# Altium PCB SmartTape.PcbDoc (part 1 of 2)
Units mm, origin at the board's own origin, x right, y up, seen from the top; angles counter-clockwise.
Board outline 81 x 35 mm, 2 copper layers (Top Layer, Bottom Layer), stack 1.57 mm thick; 71 components, 53 nets, 304 pads, 117 vias.
Unrouted connection lines stored in the file: 67.
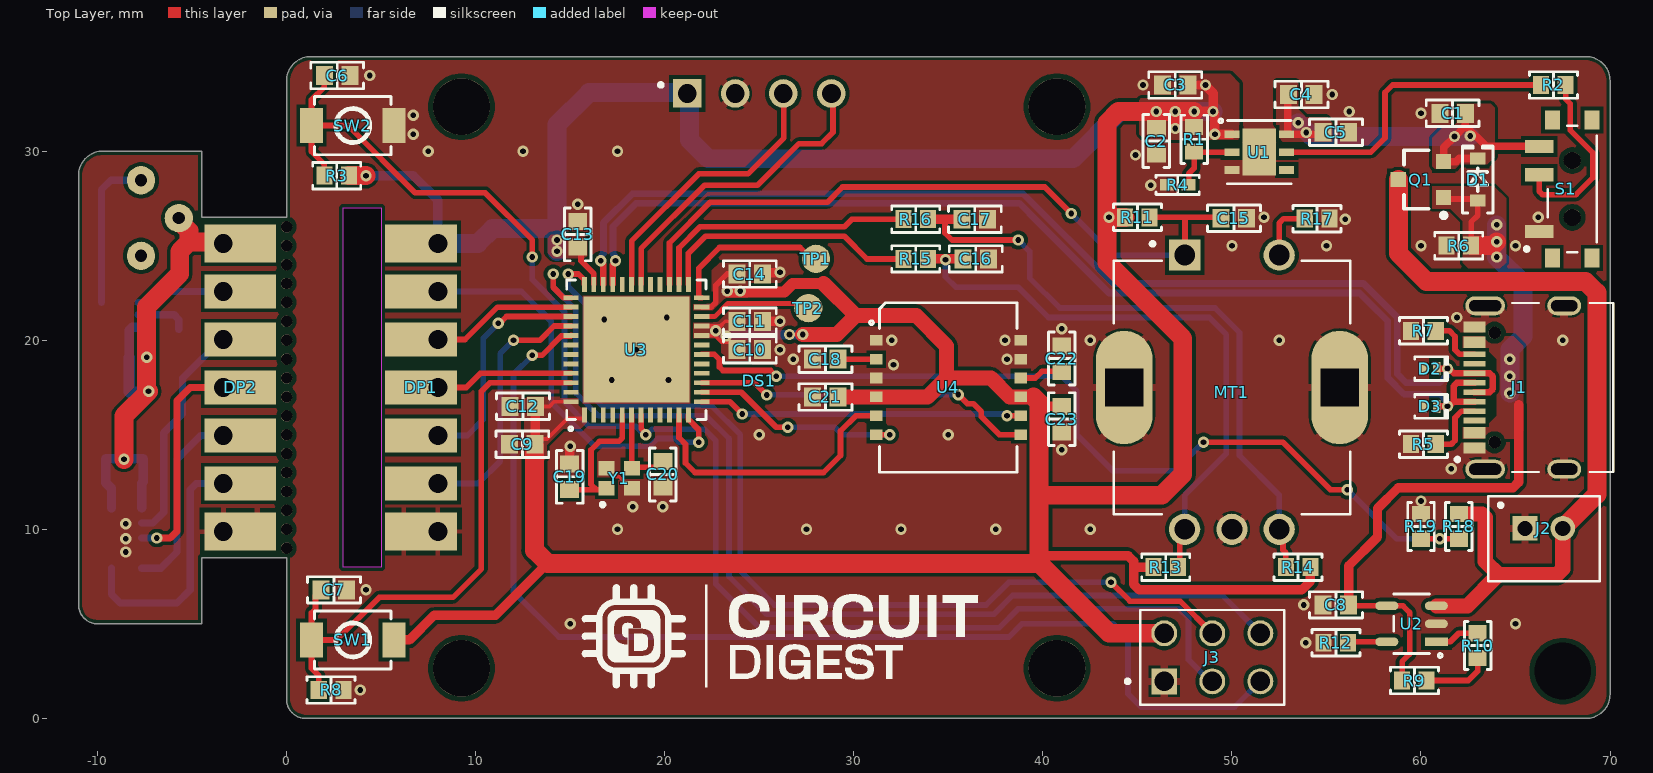
[diagram p0: Top Layer view]
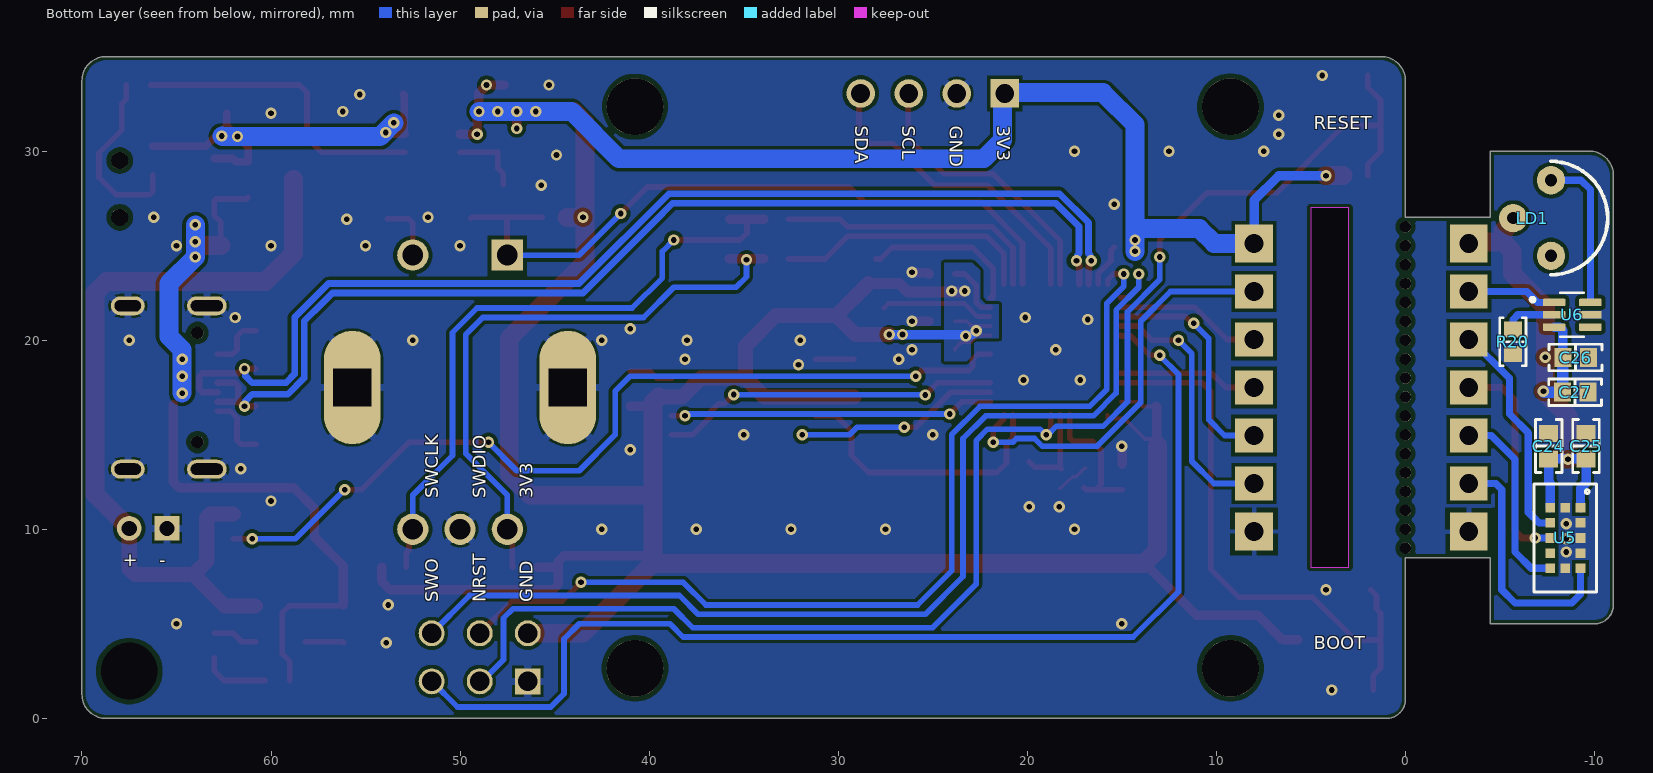
[diagram p1: Bottom Layer view, seen from below]

## Layer stack, top to bottom
Top Solder: solder mask 0.0127, Solder Resist, Dk 3.8
Top Layer: signal copper 0.035
Dielectric: core 1.5, FR-4, Dk 4.5
Bottom Layer: signal copper 0.035
Bottom Solder: solder mask 0.0127, Solder Resist, Dk 3.8

## Board outline
-10,5 cw(c-10,6) -11,6 -11,28.73 cw(c-9.73,28.73) -9.73,30 -4.5,30 -4.5,26.5 0,26.5 0,33.73 cw(c1.27,33.73) 1.27,35 68.73,35 cw(c68.73,33.73) 70,33.73 70,1.27 cw(c68.73,1.27) 68.73,0 1,0 cw(c1,1) 0,1 0,8.5 -4.5,8.5 -4.5,5
cut-out: 3,8 3,27 5,27 5,8

## Design rules (kind name [scope] priority, off if disabled: settings)
BoardOutlineClearance BoardOutlineClearance_1 [(InComponent('J1') OR InComponent('J2') OR InComponent('J3') OR InComponent('J4')OR InComponent('U2'))] p1: gap=0 ignorepadtopadclearanceinfootprint=FALSE
BoardOutlineClearance [All] p2: gap=0.2 ignorepadtopadclearanceinfootprint=FALSE
Clearance USB_PORT [InComponent('J1')] p1: gap=0.127 ignorepadtopadclearanceinfootprint=FALSE except(0.05: SMDPad-Hole; 0.15: Fill-Fill Fill-Poly Fill-Region Poly-Poly Poly-Region Region-Region; 0.18: Arc-Fill Arc-Poly Arc-Region Track-Fill Track-Poly Track-Region; 0.2: SMDPad-Fill SMDPad-Poly SMDPad-Region THPad-Fill THPad-Poly THPad-Region Via-Fill Via-Poly Via-Region; 0.25: Arc-Hole Track-Hole THPad-Hole Via-Hole Fill-Hole Poly-Hole Region-Hole Text-Hole)
Clearance [All] p2: gap=0.127 ignorepadtopadclearanceinfootprint=FALSE except(0.15: Fill-Fill Fill-Poly Fill-Region Poly-Poly Poly-Region Region-Region; 0.18: Arc-Fill Arc-Poly Arc-Region Track-Fill Track-Poly Track-Region; 0.2: SMDPad-Fill SMDPad-Poly SMDPad-Region THPad-Fill THPad-Poly THPad-Region Via-Fill Via-Poly Via-Region; 0.25: Arc-Hole Track-Hole SMDPad-Hole THPad-Hole Via-Hole Fill-Hole Poly-Hole Region-Hole Text-Hole)
DiffPairsRouting [InDifferentialPair('USB_D')] p1: maxlimit=0.15 minlimit=0.15 mostfreqgap=0.15 toplayer_minwidth=0.35 toplayer_maxwidth=0.581 toplayer_prefwidth=0.581 bottomlayer_minwidth=0.35 bottomlayer_maxwidth=0.581 bottomlayer_prefwidth=0.581 impedanceprofiledriven=TRUE impedanceprofileid={81415590-ECE1-4D54-A52A-9B79C84BBB9D} impedanceprofilevalue=90.000000 maxuncoupledlength=12.7
Height [All] p1: minheight=0 maxheight=1816.048 prefheight=12.7
HoleSize [All] p1: absolutevalues=TRUE maxlimit=6.3 minlimit=0.3 maxpercent=80.000 minpercent=20.000
HoleToHoleClearance [All] p1: gap=0.25 allowstackedmicrovias=FALSE
MinimumAnnularRing [All] p1: minimumring=0.076
MinimumSolderMaskSliver [All] p1: minsoldermaskwidth=0
PlaneClearance [All] p1: clearance=0.2
PlaneConnect PlaneConnectPowerPads [InPadClass('PowerPads')] p1: planeconnectstyle=Direct reliefexpansion=0.508 reliefentries=4 reliefconductorwidth=0.254 reliefairgap=0.254
PlaneConnect [All] p2: pad.planeconnectstyle=Relief pad.reliefexpansion=0.3 pad.reliefentries=4 pad.reliefconductorwidth=0.127 pad.reliefairgap=0.127 via.planeconnectstyle=Direct via.reliefexpansion=0.3 via.reliefentries=4 via.reliefconductorwidth=0.127 via.reliefairgap=0.127
PolygonConnect PolygonConnectPowerPads [All vs (InPadClass('PowerPads'))] p1: thpad.connectstyle=Relief thpad.reliefconductorwidth=0.4 thpad.reliefentries=4 thpad.polygonreliefangle="90 Angle" thpad.airgapwidth=0.254 thpad.conductorbypadedge=TRUE thpad.mindistance=0.381 thpad.enablemindistance=FALSE smdpad.connectstyle=Direct smdpad.reliefconductorwidth=0.254 smdpad.reliefentries=4 smdpad.polygonreliefangle="90 Angle" smdpad.airgapwidth=0.254 via.connectstyle=Direct via.reliefconductorwidth=0.254 via.reliefentries=4 via.polygonreliefangle="90 Angle" via.airgapwidth=0.254
PolygonConnect [All] p2: thpad.connectstyle=Relief thpad.reliefconductorwidth=0.4 thpad.reliefentries=4 thpad.polygonreliefangle="90 Angle" thpad.airgapwidth=0.127 thpad.conductorbypadedge=TRUE thpad.mindistance=0.381 thpad.enablemindistance=FALSE smdpad.connectstyle=Direct smdpad.reliefconductorwidth=0.127 smdpad.reliefentries=4 smdpad.polygonreliefangle="90 Angle" smdpad.airgapwidth=0.127 via.connectstyle=Direct via.reliefconductorwidth=0.127 via.reliefentries=4 via.polygonreliefangle="90 Angle" via.airgapwidth=0.127
RoutingVias [All] p1: holewidth=0.3 width=0.6 viastyle="Through Hole" minholewidth=0.3 minwidth=0.6 maxholewidth=0.6 maxwidth=6.6
SilkToSilkClearance [All] p1: silktosilkclearance=0
SilkToSolderMaskClearance [IsPad] p1: minsilkscreentomaskgap=0.1 clearancetoexposedcopper=TRUE
SolderMaskExpansion [All] p1: expansion=0.075 istentingtop=FALSE
SupplyNets "Schematic Supply Nets_4" [InNet('AGND')] p1: voltage=0.000
SupplyNets "Schematic Supply Nets_3" [InNet('AVDD')] p2: voltage=0.000
SupplyNets "Schematic Supply Nets_6" [InNet('VDD')] p3: voltage=0.000
SupplyNets "Schematic Supply Nets_5" [InNet('BAT')] p4: voltage=0.000
SupplyNets "Schematic Supply Nets_2" [InNet('3V3')] p5: voltage=0.000
SupplyNets "Schematic Supply Nets_1" [InNet('VBUS')] p6: voltage=0.000
SupplyNets "Schematic Supply Nets" [InNet('GND')] p7: voltage=0.000
Width [All] p1: maxlimit=25.4 minlimit=0.127 preferedwidth=0.127 minimp=50.000000 maximp=50.000000 favimp=50.000000
21 further rules are at their usual default settings.

## Classes and differential pairs
differential pair USB_D: +USB_D_P -USB_D_N

## Components (designator, comment, footprint, x,y, rotation, side; value= is the part's Value field where it differs from the comment)
C1 "10 µF" "CAP 0603_1608" 61.675,32 r0 top
C2 "0.1 µF" "CAP 0603_1608" 46,30.531 r90 top
C3 "10 µF" "CAP 0603_1608" 47,33.5 r0 top
C4 "0.1 µF" "CAP 0603_1608" 53.675,33 r180 top
C5 "10 µF" "CAP 0603_1608" 55.5,31 r180 top
C6 "0.1 µF" "CAP 0603_1608" 2.675,34 r180 top
C7 "0.1 µF" "CAP 0603_1608" 2.5,6.793 r180 top
C8 "1µF" "CAP 0603_1608" 55.5,6 r0 top
C9 "1µF" "CAP 0603_1608" 12.469,14.5 r0 top
C10 "0.1 µF" "CAP 0603_1608" 24.5,19.5 r180 top
C11 "1µF" "CAP 0603_1608" 24.5,21 r180 top
C12 "0.1 µF" "CAP 0603_1608" 12.5,16.5 r0 top
C13 "1µF" "CAP 0603_1608" 15.4,25.6 r270 top
C14 "10 µF" "CAP 0603_1608" 24.5,23.5 r180 top
C15 "0.1 µF" "CAP 0603_1608" 50.104,26.45 r180 top
C16 "0.1 µF" "CAP 0603_1608" 36.45,24.3 r180 top
C17 "0.1 µF" "CAP 0603_1608" 36.4,26.4 r180 top
C18 "0.1 µF" "CAP 0603_1608" 28.5,19 r0 top
C19 "8 pF" "CAP 0603_1608" 14.974,12.775 r270 top
C20 "8 pF" "CAP 0603_1608" 19.9,12.9 r90 top
C21 "0.1 µF" "CAP 0603_1608" 28.5,17 r0 top
C22 "0.1 µF" "CAP 0603_1608" 41,19.029 r270 top
C23 "0.1 µF" "CAP 0603_1608" 41,15.825 r90 top
C24 "0.1 µF" "CAP 0603_1608" -7.579,14.4 r270 bottom locked
C25 "10 µF" "CAP 0603_1608" -9.555,14.4 r270 bottom locked
C26 "1µF" "CAP 0603_1608" -9,19.084 r0 bottom locked
C27 "1µF" "CAP 0603_1608" -8.978,17.253 r0 bottom locked
D1 "CUS10S30,H3F" SOD323 63,28.5 r90 top
D2 "GG0402060R3C2P" 0402 60.474,18.5 r0 top
D3 "GG0402060R3C2P" 0402 60.474,16.5 r0 top
DP1 "DIM_PAD" DIM_PAD 6.2,25.12 r0 top locked
DP2 "DIM_PAD" DIM_PAD -1.55,9.88 r180 top locked
DS1 "OLED_128X64_1.3_I2C" LCD_OLED_128X64_1.3_I2C 25,17.5 r0 top
J1 "TYPE-C_16PIN_2MD_(073)" SHOUHAN_TYPE-C_16PIN_2MD_(073) 66.5,17.5 r90 top locked
J2 "B2B-PH-K-S(LF)(SN)" JST_B2B-PH-K-S(LF)(SN) 66.5,9.5 r180 top
J3 "TSHC-103-D-171-16-264-F-LF" MLE_TSHC-103-D-171-16-264-F-LF 48.96,3.23 r0 top
LD1 "RLD65NZN5" RLD65NZN5 -7.7,26.461 r180 bottom
MT1 "PEC11R-4215F-S0024" XDCR_PEC11R-4215F-S0024 50,17.5 r0 top locked
Q1 "AO3401A" AO-SOT-23-3L_V 60,28.5 r180 top
R1 "56 kOhms" "RES 0603_1608" 48,30.626 r90 top
R2 "1 kOhms" "RES 0603_1608" 67,33.5 r0 top
R3 "10 kOhms" "RES 0603_1608" 2.65,28.707 r0 top
R4 "10 kOhms" "RES 0402_1005" 47.133,28.219 r0 top
R5 "5.1 kOhms" "RES 0603_1608" 60.129,14.5 r0 top
R6 "100 kOhms" "RES 0603_1608" 62,25 r0 top
R7 "5.1 kOhms" "RES 0603_1608" 60.129,20.5 r0 top
R8 "10 kOhms" "RES 0603_1608" 2.35,1.5 r180 top
R9 "1 kOhms" "RES 0603_1608" 59.65,2 r180 top
R10 "0 Ohms" "RES 0603_1608" 63,3.85 r90 top
R11 "10 kOhms" "RES 0603_1608" 45,26.5 r180 top
R12 "1.65 kOhms" "RES 0603_1608" 55.5,4 r0 top
R13 "10 kOhms" "RES 0603_1608" 46.5,8 r180 top
R14 "10 kOhms" "RES 0603_1608" 53.5,8 r0 top
R15 "10 kOhms" "RES 0603_1608" 33.275,24.3 r180 top
R16 "10 kOhms" "RES 0603_1608" 33.275,26.4 r180 top
R17 "1 kOhms" "RES 0603_1608" 54.5,26.429 r180 top
R18 "100 kOhms" "RES 0603_1608" 62,10.15 r90 top
R19 "100 kOhms" "RES 0603_1608" 60,10.15 r270 top
R20 "3.74 kOhms" "RES 0603_1608" -5.686,19.917 r90 bottom locked
S1 "EG1215AA" SW_EG1215AA 68,28 r90 top
SW1 "TS-1088-AR02016" SW-SMD_L3.9-W3.0-P4.45 3.5,4.147 r180 top
SW2 "TS-1088-AR02016" SW-SMD_L3.9-W3.0-P4.45 3.5,31.353 r0 top
TP1 "ROUND PAD 1.5MM" "ROUND PAD 1.5MM"#1 27.6,24.2 r90 top
TP2 "ROUND PAD 1.5MM" "ROUND PAD 1.5MM"#2 27.6,21.7 r180 top
U1 "LD39200PU33R" SON_DFN6_3X3_STM 51.445,29.95 r0 top
U2 "LTC4057ES5-4.2" S_5_ADI 59.5,5 r180 top
U3 "STM32G491CEU6" QFPN_491CEU6_STM 18.5,19.5 r90 top locked
U4 "SCL3300-D01-10" SCL3300-D01-10_MUR 35,17.5 r0 top locked
U5 "VL53L4CXV0DH/1" LGA12_STM -8.461,9.54 r180 bottom locked
U6 "CAT4002A" CAT4002A -8.823,21.347 r180 bottom locked
Y1 "ECS-240-8-37B-CKY-TR" XTAL_ECS-160-9-37-CKM-TR 17.6,12.7 r0 top

## Footprints (in the part's own frame and the unit in brackets; to place one, negate y for a bottom-side part, rotate by r counter-clockwise, add the part's x,y. Pads: shape width x height; smd on the part's side, far side on the other; paste and mask are expansions set on the pad)
0402 [mm] "SODFL, 2-Leads, Body 0.675x1.075mm, IPC Medium Density"
  rect 0.4x0.7 smd: 1(-0.35,0) 2(0.35,0)
  silkscreen extent -0.8,-0.63 0.92,0.63, body extent -0.51,-0.31 0.5,0.3, height 0.45
AO-SOT-23-3L_V [mm] "SOT23, 3-Leads, Body 3.1x1.8mm, Pitch 0.95mm"
  rect 0.8x0.8 smd: 1(-1.2,0.95) 2(-1.2,-0.95) 3(1.2,0)
  silkscreen extent -1.33,-1.55 0.9,2.02, body extent -1.5,-1.55 1.5,1.55, height 1.25
"CAP 0603_1608" [mm] "Chip Capacitor, 2-Leads, Body 1.60x0.80mm, IPC Medium Density"
  rect 0.9x1 smd: 1(-0.675,0) 2(0.675,0)
  silkscreen extent -1.4,-0.7 1.4,0.7, body extent -0.8,-0.41 0.8,0.41, height 0.82
CAT4002A [mm]
  rrect25% 1.19x0.4 smd: 1(-0.96,0.65) 2(-0.96,0) 3(-0.96,-0.65) 4(0.96,-0.65) 5(0.96,0) 6(0.96,0.65)
  silkscreen extent -2.2,-1.17 0.63,1.17, body extent -1.05,-1 1.05,1, height 1.1
DIM_PAD [mm]
  rect 2x2 smd paste-2539.97: 1(0,0) 7(0,-15.24)
  rect 2x2 hole 1 paste-2539.97: 1(1.8,0) 7(1.8,-15.24)
  rect 2x1.8 smd paste-2539.97: 2(0,-2.54) 3(0,-5.08) 4(0,-7.62) 5(0,-10.16) 6(0,-12.7)
  rect 2x1.8 hole 1 paste-2539.97: 2(1.8,-2.54) 3(1.8,-5.08) 4(1.8,-7.62) 5(1.8,-10.16) 6(1.8,-12.7)
JST_B2B-PH-K-S(LF)(SN) [mm]
  rect 1.308x1.308 / inner round 1.308 / far side rect 1.308x1.308 hole 0.8: 1(1,-0.55)
  round 1.308 hole 0.8: 2(-1,-0.55)
  silkscreen extent -2.95,-2.25 2.95,2.25, body extent -2.95,-2.25 2.95,2.25, height 6
LCD_OLED_128X64_1.3_I2C [mm]
  rect 1.508x1.508 / inner round 1.508 / far side rect 1.508x1.508 hole 1: 1(-3.81,15.55)
  round 1.508 hole 1: 2(-1.27,15.55) 3(1.27,15.55) 4(3.81,15.55)
  round 3 hole 3 unplated: ""(-15.75,-14.85) ""(-15.75,14.85) ""(15.75,-14.85) ""(15.75,14.85)
  silkscreen extent -5.31,15.9 -5.11,16.1, body extent -17.7,-16.77 17.7,16.73, height 13.69
LGA12_STM [mil]
  rect 20x20 smd paste+0 mask+0: 1(31.49,62.99) 2(31.49,31.5) 3(31.49,0) 4(31.49,-31.5) 5(31.49,-62.99) 6(0,-62.99) 7(-31.49,-62.99) 8(-31.49,-31.5) 9(-31.49,0) 10(-31.49,31.5) 11(-31.49,62.99) 12(0,62.99)
  silkscreen extent -65,-113 65,113
MLE_TSHC-103-D-171-16-264-F-LF [mil]
  rect 54x54 / inner round 54 / far side rect 54x54 hole 40 mask+4.02: 01(-100,-50)
  round 54 hole 40 mask+4.02: 02(-100,50) 03(0,-50) 04(0,50) 05(100,-50) 06(100,50)
  silkscreen extent -180,-99 150,99, body extent -150,-98 150,98, height 364
QFPN_491CEU6_STM [mm]
  rect 0.808x0.255 smd paste+0 mask+0: 1(-3.452,2.751) 2(-3.452,2.251) 3(-3.452,1.75) 4(-3.452,1.25) 5(-3.452,0.75) 6(-3.452,0.25) 7(-3.452,-0.25) 8(-3.452,-0.75) 9(-3.452,-1.25) 10(-3.452,-1.75) 11(-3.452,-2.251) 12(-3.452,-2.751) 25(3.452,-2.751) 26(3.452,-2.251) 27(3.452,-1.75) 28(3.452,-1.25) 29(3.452,-0.75) 30(3.452,-0.25) 31(3.452,0.25) 32(3.452,0.75) 33(3.452,1.25) 34(3.452,1.75) 35(3.452,2.251) 36(3.452,2.751)
  rect 0.255x0.808 smd paste+0 mask+0: 13(-2.751,-3.452) 14(-2.251,-3.452) 15(-1.75,-3.452) 16(-1.25,-3.452) 17(-0.75,-3.452) 18(-0.25,-3.452) 19(0.25,-3.452) 20(0.75,-3.452) 21(1.25,-3.452) 22(1.75,-3.452) 23(2.251,-3.452) 24(2.751,-3.452) 37(2.751,3.452) 38(2.251,3.452) 39(1.75,3.452) 40(1.25,3.452) 41(0.75,3.452) 42(0.25,3.452) 43(-0.25,3.452) 44(-0.75,3.452) 45(-1.25,3.452) 46(-1.75,3.452) 47(-2.251,3.452) 48(-2.751,3.452)
  rect 5.6x5.6 smd paste-2.845 mask+0: 49(0,0)
  silkscreen extent -4.28,-3.68 3.68,3.68, body extent -3.56,-3.56 3.56,3.56, height 0.61
"RES 0402_1005" [mm] "Chip Resistor, 2-Leads, Body 1.0x0.5mm, IPC Medium Density"
  rect 0.75x0.6 smd: 1(-0.575,0) 2(0.575,0)
  silkscreen extent -1.14,-0.51 1.14,0.51, body extent -0.5,-0.25 0.5,0.25, height 0.35
"RES 0603_1608" [mm] "Chip Resistor, 2-Leads, Body 1.60x0.80mm, IPC Medium Density"
  rect 0.85x0.95 smd: 1(-0.65,0) 2(0.65,0)
  silkscreen extent -1.27,-0.7 1.27,0.7, body extent -0.8,-0.4 0.8,0.4, height 0.45
RLD65NZN5 [mm]
  round 1.5 hole 0.65: 1(0,2) 2(0,-2) 3(-2,0)
  silkscreen extent 0,-3 3,3
"ROUND PAD 1.5MM"#1 [mm]
  round 1.5 smd paste-2539.97: 1(0.1,-0.4)
"ROUND PAD 1.5MM"#2 [mm]
  round 1.5 smd paste-2539.97: 1(0,0)
S_5_ADI [mil]
  rect 48x18 smd paste+0 mask+0: 1(-51.57,37.4)
  oval 48x18 smd paste+0 mask+0: 2(-51.57,0) 3(-51.57,-37.4) 4(51.57,-37.4) 5(51.57,37.4)
  silkscreen extent -64,-62 37,70, body extent -62,-57 62,57, height 39
SCL3300-D01-10_MUR [mm]
  rect 0.656x0.56 smd paste+0 mask+0: 1(-3.82,2.5) 2(-3.82,1.5) 3(-3.82,0.5) 4(-3.82,-0.5) 5(-3.82,-1.5) 6(-3.82,-2.5) 7(3.82,-2.5) 8(3.82,-1.5) 9(3.82,-0.5) 10(3.82,0.5) 11(3.82,1.5) 12(3.82,2.5)
  silkscreen extent -4.17,-4.48 3.63,4.48, body extent -3.85,-4.36 3.85,4.36, height 3.41
SHOUHAN_TYPE-C_16PIN_2MD_(073) [mm]
  rect 0.6x1.15 smd paste+0 mask+0: A1_B12(-3.2,3.67) A4_B9(-2.4,3.67) B1_A12(3.2,3.67) B4_A9(2.4,3.67)
  rect 0.3x1.15 smd paste+0 mask+0: A5(-1.25,3.67) A6(-0.25,3.67) A7(0.25,3.67) A8(1.25,3.67) B5(1.75,3.67) B6(0.75,3.67) B7(-0.75,3.67) B8(-1.75,3.67)
  oval 1x1.8 hole 0.6 slot 1.4 at 90 deg mask+0.102: SH1(-4.32,-1.075) SH2(4.32,-1.075)
  oval 1x2.1 hole 0.6 slot 1.7 at 90 deg mask+0.102: SH3(-4.32,3.105) SH4(4.32,3.105)
  round 0.65 hole 0.65 unplated mask+0: ""(-2.89,2.605) ""(2.89,2.605)
  silkscreen extent -4.47,-3.67 4.47,4.67, body extent -4.47,-3.67 4.47,3.98, height 3.26
SOD323 [mm] "SOD, 2-Leads, Body 1.25x2.50mm, IPC Medium Density"
  rect 0.625x0.83 smd: 1(-1.112,0) 2(1.112,0)
  silkscreen extent -1.78,-0.8 1.78,0.8, body extent -1.36,-0.62 1.36,0.62, height 1.05
SON_DFN6_3X3_STM [mm]
  rect 0.808x0.407 smd paste+0 mask+0: 1(-1.445,0.95) 2(-1.445,0) 3(-1.445,-0.95) 4(1.445,-0.95) 5(1.445,0) 6(1.445,0.95)
  rect 1.753x2.489 smd paste+0 mask+0: 7(0,0)
  silkscreen extent -2.13,-1.68 1.68,1.75, body extent -1.55,-1.55 1.55,1.55, height 0.94
SW-SMD_L3.9-W3.0-P4.45 [mm]
  rect 1.23x1.86 smd: 1(-2.185,0) 2(2.185,0)
  silkscreen extent -2.03,-1.54 2.03,1.54, body extent -2.4,-1.32 2.4,1.58, height 2.01
SW_EG1215AA [mm]
  rect 0.7x1.5 smd paste+0 mask+0.102: 1(-2.25,1.75) 2(0.75,1.75) 3(2.25,1.75)
  rect 1x0.8 smd paste+0 mask+0.102: S1(-3.65,1.05) S2(-3.65,-1.05) S3(3.65,-1.05) S4(3.65,1.05)
  round 0.9 hole 0.9 unplated mask+0: ""(-1.5,0) ""(1.5,0)
  silkscreen extent -3.35,-1.3 3.35,2.51, body extent -3.85,-2.7 3.85,2.2, height 1.41
XDCR_PEC11R-4215F-S0024 [mm]
  rect 1.65x1.65 hole 1.1: 1(-2.5,7)
  round 1.65 hole 1.1: 2(2.5,7) A(-2.5,-7.5) B(2.5,-7.5) COM(0,-7.5)
  oval 3x6 hole 2 square: S1(-5.7,0) S2(5.7,0)
  silkscreen extent -6.25,-6.7 6.25,7.7, body extent -6.93,-7.6 6.93,7.1, height 21.51
XTAL_ECS-160-9-37-CKM-TR [mm]
  rect 0.85x0.75 smd: 1(-0.675,-0.525) 2(0.675,-0.525) 3(0.675,0.525) 4(-0.675,0.525)
  silkscreen extent -0.99,-1.5 -0.79,-1.3, body extent -1,-0.8 1,0.8, height 0.5

## Part data
C1 C3 C5 C14 C25: library part GMC10X7R106M6R3NT, "CAP0603 X7R 10UF 20% 6.3V", Device Package="0603 (1608 Metric)", Manufacturer="Cal-Chip Electronics, Inc.", Operating Temperature="-55°C ~ 125°C", Supplier Part Number 1=4713-GMC10X7R106M6R3NTCT-ND, Temperature Coefficient=X7R, Tolerance=±20%, Voltage - Rated=6.3V, Applications="General Purpose", Capacitance="10 µF", ComponentLink1Description=Datasheet, ComponentLink1URL=https://88ce57.p3cdn1.secureserver.net/wp-content/uploads/2023/01/gmc_series-2.pdf, ComponentLink2Description="DigiKey Link", ComponentLink2URL=https://www.digikey.com/en/products/detail/cal-chip-electronics-inc/GMC10X7R106M6R3NT/18151153, id=9373, LastUpdated=2023-04-21T19:07:51.070, Lifecycle Status=Active, Minimum Order=1, Mounting Type="Surface Mount, MLCC", Package / Case="0603 (1608 Metric)", Packaging=TapeAndReel, Part Number=GMC10X7R106M6R3NT, Part Status=Active, PartId=49831, Price=0.14, Series=GMC, Size / Dimension="0.063\" L x 0.031\" W (1.60mm x 0.80mm)", Supplier 1=DigiKey, Thickness (Max)="0.039\" (1.00mm)"
C2 C4 C6 C7 C10 C12 C15 C16 C17 C18 C21 C22 C23 C24: library part CS0603KRX7R7BB104, "CAP CER 0.1UF 16V X7R 0603", Device Package="0603 (1608 Metric)", Manufacturer=Yageo, Operating Temperature="-55°C ~ 125°C", Supplier Part Number 1=311-3560-1-ND, Temperature Coefficient=X7R, Tolerance=±10%, Voltage - Rated=16V, Applications="Boardflex Sensitive", Capacitance="0.1 µF", ComponentLink1Description=Datasheet, ComponentLink1URL=http://www.yageo.com/NewPortal/yageodocoutput?fileName=/pdf/MLCC/UPY-ST_NPOX7R_16V-to-3KV_5.pdf, ComponentLink2Description="DigiKey Link", ComponentLink2URL=https://www.digikey.com/en/products/detail/yageo/CS0603KRX7R7BB104/6097897, Features="Soft Termination", id=56, LastUpdated=2023-01-03T20:07:47.973, Lifecycle Status=Active, Minimum Order=1, Mounting Type="Surface Mount, MLCC", Package / Case="0603 (1608 Metric)", Packaging=TapeAndReel, Part Number=CS0603KRX7R7BB104, Part Status=Active, PartId=2286, Price=0.02, Series=CS, Size / Dimension="0.063\" L x 0.031\" W (1.60mm x 0.80mm)", Supplier 1=DigiKey, Thickness (Max)="0.037\" (0.95mm)"
C8 C9 C11 C13 C26 C27: library part 0603ZG105ZAT2A, "CAP CER 1UF 10V Y5V 0603", Device Package="0603 (1608 Metric)", Manufacturer="AVX Corporation", Operating Temperature="-30°C ~ 85°C", Supplier Part Number 1=478-1265-1-ND, Temperature Coefficient="Y5V (F)", Tolerance="-20%, +80%", Voltage - Rated=10V, Applications="General Purpose", Capacitance=1µF, ComponentLink1Description=Datasheet, ComponentLink1URL=http://datasheets.avx.com/Y5V.pdf, ComponentLink2Description="DigiKey Link", ComponentLink2URL=http://digikey.com/product-detail/en/avx-corporation/0603ZG105ZAT2A/478-1265-1-ND/564297, id=522, LastUpdated=2020-09-02T01:03:32.277, Lifecycle Status=Active, Minimum Order=1, Mounting Type="Surface Mount, MLCC", Package / Case="0603 (1608 Metric)", Packaging=TapeAndReel, Part Number=0603ZG105ZAT2A, Part Status=Active, PartId=4251, Price=0.02, Series=-, Size / Dimension="0.063\" L x 0.032\" W (1.60mm x 0.81mm)", Supplier 1=DigiKey, Thickness (Max)="0.035\" (0.90mm)"
C19 C20: library part CGA3E2C0G1H080D080AD, "CAP CER 8PF 50V 0603 EPOXY", Device Package="0603 (1608 Metric)", Manufacturer="TDK Corporation", Operating Temperature="-55°C ~ 125°C", Ratings=AEC-Q200, Supplier Part Number 1=445-9807-1-ND, Temperature Coefficient="C0G, NP0", Tolerance=±0.5pF, Voltage - Rated=50V, Applications=Automotive, Capacitance="8 pF", ComponentLink1Description=Datasheet, ComponentLink1URL=https://product.tdk.com/info/en/catalog/datasheets/mlcc_automotive_epoxy_en.pdf?ref_disty=digikey, ComponentLink2Description="DigiKey Link", ComponentLink2URL=https://www.digikey.com/en/products/detail/tdk-corporation/CGA3E2C0G1H080D080AD/3933540, Features="Epoxy Mountable", id=983, LastUpdated=2023-01-03T20:07:37.107, Lifecycle Status=Active, Minimum Order=1, Mounting Type="Surface Mount, MLCC, Epoxy", Package / Case="0603 (1608 Metric)", Packaging=TapeAndReel, Part Number=CGA3E2C0G1H080D080AD, Part Status=Active, PartId=6342, Price=0.02, Series=CGA, Size / Dimension="0.063\" L x 0.031\" W (1.60mm x 0.80mm)", Supplier 1=DigiKey, Thickness (Max)="0.037\" (0.95mm)"
D1: "DIODE SCHOTTKY 30V 1A USC", Capacitance @ Vr, F="135pF @ 0V, 1MHz", Current - Average Rectified (Io)=1A, Current - Reverse Leakage @ Vr="500 µA @ 30 V", Manufacturer="Toshiba Semiconductor and Storage", Operating Temperature - Junction="125°C (Max)", Package / Case="SC-76, SOD-323", Supplier Device Package=USC, Supplier Part Number 1=CUS10S30H3FCT-ND, Voltage - DC Reverse (Vr) (Max)="30 V", Voltage - Forward (Vf) (Max) @ If="230 mV @ 100 mA", ComponentLink1Description=Datasheet, ComponentLink1URL=https://toshiba.semicon-storage.com/info/docget.jsp?did=14077&prodName=CUS10S30, ComponentLink2Description="DigiKey Link", ComponentLink2URL=https://www.digikey.com/en/products/detail/toshiba-semiconductor-and-storage/CUS10S30-H3F/5114299, Diode Type=Schottky, id=3067, LastUpdated=2023-01-02T21:07:53.950, Lifecycle Status=Active, Minimum Order=1, Mounting Type="Surface Mount", Packaging=TapeAndReel, Part Number=CUS10S30,H3F, Part Status=Active, PartId=3067, Price=0.05, Series=-, Speed="Fast Recovery =< 500ns, > 200mA (Io)", Supplier 1=DigiKey
D2 D3: "TVS DIODE 6.5VWM 15.5VC 0402", Capacitance @ Frequency="0.3pF @ 1MHz", Current - Peak Pulse (10/1000µs)="3A (8/20µs)", Device Package="0402 (1005 Metric)", Manufacturer="KYOCERA AVX", Operating Temperature="-55°C ~ 125°C", Power - Peak Pulse=54W, Power Line Protection=No, Supplier Device Package=0402, Supplier Part Number 1=478-GG0402060R3C2PCT-ND, Voltage - Breakdown (Min)=7V, Voltage - Clamping (Max) @ Ipp=15.5V, Voltage - Reverse Standoff (Typ)=6.5V, Applications="Ethernet, HDMI, USB", Bidirectional Channels=1, ComponentLink1Description=Datasheet, ComponentLink1URL=https://datasheets.kyocera-avx.com/AVX-GiGuard.pdf, ComponentLink2Description="DigiKey Link", ComponentLink2URL=https://www.digikey.com/en/products/detail/kyocera-avx/GG0402060R3C2P/13557242, id=6041, LastUpdated=2023-01-02T21:10:15.003, Lifecycle Status=Active, Minimum Order=1, Mounting Type="Surface Mount", Package / Case="0402 (1005 Metric)", Packaging=TapeAndReel, Part Number=GG0402060R3C2P, Part Status=Active, PartId=11515, Price=0.03, Series=GiGUARD, Supplier 1=DigiKey, Type=Zener
DS1: "Non-Touch Graphic LCD Display Module Transmissive White OLED, Monochrome I2C 1.3 (33.02mm) 128 x 64", Package=None, Check_prices=https://www.snapeda.com/parts/OLED%20128x64%201.3%22%20I2C/UNIVERSAL-SOLDER+Electronics+Ltd/view-part/?ref=eda, MF="UNIVERSAL-SOLDER Electronics Ltd", MP="OLED 128x64 1.3&quot; I2C", SnapEDA_Link=https://www.snapeda.com/parts/OLED%20128x64%201.3%22%20I2C/UNIVERSAL-SOLDER+Electronics+Ltd/view-part/?ref=snap
J1: "DC-5V 5A Type C USB", Package=Package, Check_prices=https://www.snapeda.com/parts/TYPE-C%2016PIN%202MD%20(073)/Shouhan/view-part/?ref=eda, MF=Shouhan, MP="TYPE-C 16PIN 2MD (073)", SnapEDA_Link=https://www.snapeda.com/parts/TYPE-C%2016PIN%202MD%20(073)/Shouhan/view-part/?ref=snap
J2: "Connector Header Through Hole 2 position 0.079 (2.00mm)", Package=None, Check_prices=https://www.snapeda.com/parts/B2B-PH-K-S%20(LF)(SN)/JST/view-part/?ref=eda, MF=JST, MP="B2B-PH-K-S (LF)(SN)", SnapEDA_Link=https://www.snapeda.com/parts/B2B-PH-K-S%20(LF)(SN)/JST/view-part/?ref=snap
J3: "6 Position Dual Row (3x2) 2.54mm Pitch Non-Shrouded Header", Package=None, Check_prices=https://www.snapeda.com/parts/TSHC-103-D-171-16-264-F-LF/Major+League+Electronics/view-part/?ref=eda, MF="Major League Electronics", MP=TSHC-103-D-171-16-264-F-LF, SnapEDA_Link=https://www.snapeda.com/parts/TSHC-103-D-171-16-264-F-LF/Major+League+Electronics/view-part/?ref=snap
MT1: "Incremental Encoder, 12 Mm, Contact Rating 10 Ma - 5 Vdc", Package=None, Availability=Unavailable, MP=PEC11R-4215F-S0024, Price=None
Q1: library part CMP-2000-05778-1, "P-Channel MOSFET, 30 V, 4 A, -55 to 150 degC, 3-Pin SOT-23-3L, RoHS, Tape and Reel", Continuous Drain Current=4A, Drain-Source On-Volt=30V, Frequency (Max)=NotRequiredMHz, Gate-Source Voltage (Max)=?12V, Manufacturer="Alpha and Omega", Operating Temp Range=-55Cto150C, Operating Temperature Classification=Military, Output Power (Max)=NotRequiredW, Package Description="3-Pin Small Outline Transistor, Body 2.95 x 1.6 mm, Pitch 0.95 mm", Package Reference=SOT-23-3L, Package Type=SOT-23, Power Dissipation=1.4W, Power Gain=NotRequireddB, Channel Mode=Enhancement, Datasheet URL=http://www.aosmd.com/res/data_sheets/AO3401A.pdf, Datasheet Version="Rev. 3, 03/2011", Drain Current (Max)=4A, Drain Efficiency=NotRequired%, Drain-Source On-Res=0.044ohm, Manufacturer URL=http://www.aosmd.com/, Mounting=SurfaceMount, Mounting Technology=SurfaceMount, Noise Figure=NotRequireddB, Number of  Elements=1, Package URL=http://www.aosmd.com/res/packaging_information/SOT-23-3L.pdf, Pin Count=3, Polarity=P, Rad Hardened=No, Type=PowerMOSFET
R1: library part RT0603BRD0756KL, "RES SMD 56K OHM 0.1% 1/10W 0603", Device Package="0603 (1608 Metric)", Manufacturer=Yageo, Operating Temperature="-55°C ~ 155°C", Power (Watts)="0.1W, 1/10W", Supplier Device Package=0603, Supplier Part Number 1=YAG4576CT-ND, Temperature Coefficient=±25ppm/°C, Tolerance=±0.1%, ComponentLink1Description=Datasheet, ComponentLink1URL=https://www.yageo.com/upload/media/product/productsearch/datasheet/rchip/PYu-RT_1-to-0.01_RoHS_L_11.pdf, ComponentLink2Description="DigiKey Link", ComponentLink2URL=https://www.digikey.com/en/products/detail/yageo/RT0603BRD0756KL/1072582, Composition="Thin Film", Height - Seated (Max)="0.022\" (0.55mm)", id=2137, LastUpdated=2023-01-02T20:30:09.580, Lifecycle Status=Active, Minimum Order=1, Number Of Terminations=2, Package / Case="0603 (1608 Metric)", Packaging=TapeAndReel, Part Number=RT0603BRD0756KL, Part Status=Active, PartId=9254, Price=0.04, Resistance="56 kOhms", Series=RT, Size / Dimension="0.063\" L x 0.031\" W (1.60mm x 0.80mm)", Supplier 1=DigiKey
R2 R9 R17: library part CPF0603B1K0E, "RES SMD 1K OHM 0.1% 1/16W 0603", Device Package="0603 (1608 Metric)", Manufacturer="TE Connectivity Passive Product", Operating Temperature="-55°C ~ 155°C", Power (Watts)="0.063W, 1/16W", Supplier Device Package=0603, Supplier Part Number 1=A119887CT-ND, Temperature Coefficient=±25ppm/°C, Tolerance=±0.1%, ComponentLink1Description=Datasheet, ComponentLink1URL=https://www.te.com/commerce/DocumentDelivery/DDEController?Action=srchrtrv&DocNm=1773200&DocType=DS&DocLang=English, ComponentLink2Description="DigiKey Link", ComponentLink2URL=https://www.digikey.com/en/products/detail/te-connectivity-passive-product/CPF0603B1K0E/2390473, Composition="Thin Film", Height - Seated (Max)="0.022\" (0.55mm)", id=16, LastUpdated=2023-01-02T20:30:26.897, Lifecycle Status=Active, Minimum Order=1, Number Of Terminations=2, Package / Case="0603 (1608 Metric)", Packaging=TapeAndReel, Part Number=CPF0603B1K0E, Part Status=Active, PartId=4877, Price=0.09, Resistance="1 kOhms", Series="CPF, Neohm", Size / Dimension="0.061\" L x 0.031\" W (1.55mm x 0.80mm)", Supplier 1=DigiKey
R3 R8 R11 R13 R14 R15 R16: library part RNCS0603BKE10K0, "RES 10K OHM 0.1% 1/16W 0603", Device Package="0603 (1608 Metric)", Manufacturer="Stackpole Electronics Inc", Operating Temperature="-55°C ~ 155°C", Power (Watts)="0.063W, 1/16W", Ratings=AEC-Q200, Supplier Device Package=0603, Supplier Part Number 1=RNCS0603BKE10K0CT-ND, Temperature Coefficient=±25ppm/°C, Tolerance=±0.1%, ComponentLink1Description=Datasheet, ComponentLink1URL=https://www.seielect.com/catalog/sei-rncs_rnch.pdf, ComponentLink2Description="DigiKey Link", ComponentLink2URL=https://www.digikey.com/en/products/detail/stackpole-electronics-inc/RNCS0603BKE10K0/1708836, Composition="Thin Film", Features="Anti-Corrosive, Automotive AEC-Q200, Moisture Resistant", Height - Seated (Max)="0.022\" (0.55mm)", id=1, LastUpdated=2023-01-02T20:30:27.037, Lifecycle Status=Active, Minimum Order=1, Number Of Terminations=2, Package / Case="0603 (1608 Metric)", Packaging=TapeAndReel, Part Number=RNCS0603BKE10K0, Part Status=Active, PartId=4838, Price=0.07, Resistance="10 kOhms", Series=RNCS, Size / Dimension="0.061\" L x 0.031\" W (1.55mm x 0.80mm)", Supplier 1=DigiKey
R4: library part RT0402BRE0710KL, "RES SMD 10K OHM 0.1% 1/16W 0402", Device Package="0402 (1005 Metric)", Manufacturer=Yageo, Operating Temperature="-55°C ~ 155°C", Power (Watts)="0.063W, 1/16W", Supplier Device Package=0402, Supplier Part Number 1=YAG2305CT-ND, Temperature Coefficient=±50ppm/°C, Tolerance=±0.1%, ComponentLink1Description=Datasheet, ComponentLink1URL=https://www.yageo.com/upload/media/product/productsearch/datasheet/rchip/PYu-RT_1-to-0.01_RoHS_L_11.pdf, ComponentLink2Description="DigiKey Link", ComponentLink2URL=https://www.digikey.com/en/products/detail/yageo/RT0402BRE0710KL/1069451, Composition="Thin Film", Height - Seated (Max)="0.014\" (0.35mm)", id=1919, LastUpdated=2023-01-02T20:21:36.193, Lifecycle Status=Active, Minimum Order=1, Number Of Terminations=2, Package / Case="0402 (1005 Metric)", Packaging=TapeAndReel, Part Number=RT0402BRE0710KL, Part Status=Active, PartId=6060, Price=0.04, Resistance="10 kOhms", Series=RT, Size / Dimension="0.039\" L x 0.020\" W (1.00mm x 0.50mm)", Supplier 1=DigiKey
R5 R7: library part RMCF0603JG5K10, "RES 5.1K OHM 5% 1/10W 0603", Device Package="0603 (1608 Metric)", Manufacturer="Stackpole Electronics Inc", Operating Temperature="-55°C ~ 155°C", Power (Watts)="0.1W, 1/10W", Ratings=AEC-Q200, Supplier Device Package=0603, Supplier Part Number 1=RMCF0603JG5K10CT-ND, Temperature Coefficient=±200ppm/°C, Tolerance=±5%, ComponentLink1Description=Datasheet, ComponentLink1URL=https://www.seielect.com/catalog/sei-packaging.pdf, ComponentLink2Description="DigiKey Link", ComponentLink2URL=https://www.digikey.com/en/products/detail/stackpole-electronics-inc/RMCF0603JG5K10/1712287, Composition="Thick Film", Features="Automotive AEC-Q200", Height - Seated (Max)="0.022\" (0.55mm)", id=158, LastUpdated=2023-01-02T20:30:25.707, Lifecycle Status=Active, Minimum Order=1, Number Of Terminations=2, Package / Case="0603 (1608 Metric)", Packaging=CutTape, Part Number=RMCF0603JG5K10, Part Status=Active, PartId=5180, Price=0.01, Resistance="5.1 kOhms", Series=RMCF, Size / Dimension="0.061\" L x 0.031\" W (1.55mm x 0.80mm)", Supplier 1=DigiKey
R6 R18 R19: library part RNCS0603BKE100K, "RES 100K OHM 0.1% 1/16W 0603", Device Package="0603 (1608 Metric)", Manufacturer="Stackpole Electronics Inc", Operating Temperature="-55°C ~ 155°C", Power (Watts)="0.063W, 1/16W", Ratings=AEC-Q200, Supplier Device Package=0603, Supplier Part Number 1=RNCS0603BKE100KCT-ND, Temperature Coefficient=±25ppm/°C, Tolerance=±0.1%, ComponentLink1Description=Datasheet, ComponentLink1URL=https://www.seielect.com/catalog/sei-rncs_rnch.pdf, ComponentLink2Description="DigiKey Link", ComponentLink2URL=https://www.digikey.com/en/products/detail/stackpole-electronics-inc/RNCS0603BKE100K/1708835, Composition="Thin Film", Features="Anti-Corrosive, Automotive AEC-Q200, Moisture Resistant", Height - Seated (Max)="0.022\" (0.55mm)", id=6, LastUpdated=2023-01-02T20:30:27, Lifecycle Status=Active, Minimum Order=1, Number Of Terminations=2, Package / Case="0603 (1608 Metric)", Packaging=TapeAndReel, Part Number=RNCS0603BKE100K, Part Status=Active, PartId=4849, Price=0.08, Resistance="100 kOhms", Series=RNCS, Size / Dimension="0.061\" L x 0.031\" W (1.55mm x 0.80mm)", Supplier 1=DigiKey
R10: library part PA0603-R-070RL, "RES 0 OHM JUMPER 1/10W 0603", Device Package="0603 (1608 Metric)", Manufacturer=Yageo, Operating Temperature="-55°C ~ 155°C", Power (Watts)="0.1W, 1/10W", Supplier Device Package=0603, Supplier Part Number 1=YAG5757CT-ND, Temperature Coefficient=±150ppm/°C, Tolerance=Jumper, ComponentLink1Description=Datasheet, ComponentLink1URL=http://www.yageo.com/NewPortal/_en/search/productDocs.jsp?YageoPartNumber=PA0603-R-070RL, ComponentLink2Description="DigiKey Link", ComponentLink2URL=https://www.digikey.com/en/products/detail/yageo/PA0603-R-070RL/8255972, Composition="Metal Element", Features="Automotive AEC-Q200, Current Sense", Height - Seated (Max)="0.024\" (0.60mm)", id=11, LastUpdated=2023-01-02T20:30:26.940, Lifecycle Status=Active, Minimum Order=1, Number Of Terminations=2, Package / Case="0603 (1608 Metric)", Packaging=TapeAndReel, Part Number=PA0603-R-070RL, Part Status=Active, PartId=4862, Price=0.08, Resistance="0 Ohms", Series=PA, Size / Dimension="0.063\" L x 0.031\" W (1.60mm x 0.80mm)", Supplier 1=DigiKey
R12: library part RC0603FR-071K65L, "RES 1.65K OHM 1% 1/10W 0603", Device Package="0603 (1608 Metric)", Manufacturer=Yageo, Operating Temperature="-55°C ~ 155°C", Power (Watts)="0.1W, 1/10W", Supplier Device Package=0603, Supplier Part Number 1=311-1.65KHRCT-ND, Temperature Coefficient=±100ppm/°C, Tolerance=±1%, ComponentLink1Description=Datasheet, ComponentLink1URL=https://www.yageo.com/upload/media/product/productsearch/datasheet/rchip/PYu-RC_Group_51_RoHS_L_10.pdf, ComponentLink2Description="DigiKey Link", ComponentLink2URL=https://www.digikey.com/en/products/detail/yageo/RC0603FR-071K65L/726870, Composition="Thick Film", Features="Moisture Resistant", Height - Seated (Max)="0.022\" (0.55mm)", id=1322, LastUpdated=2023-01-02T20:30:16.083, Lifecycle Status=Active, Minimum Order=1, Number Of Terminations=2, Package / Case="0603 (1608 Metric)", Packaging=CutTape, Part Number=RC0603FR-071K65L, Part Status=Active, PartId=7585, Price=0.01, Resistance="1.65 kOhms", Series=RC_L, Size / Dimension="0.063\" L x 0.031\" W (1.60mm x 0.80mm)", Supplier 1=DigiKey
R20: library part RNCF0603DTE3K74, "RES 3.74K OHM 0.5% 1/10W 0603", Device Package="0603 (1608 Metric)", Manufacturer="Stackpole Electronics Inc", Operating Temperature="-55°C ~ 155°C", Power (Watts)="0.1W, 1/10W", Ratings=AEC-Q200, Supplier Device Package=0603, Supplier Part Number 1=RNCF0603DTE3K74CT-ND, Temperature Coefficient=±25ppm/°C, Tolerance=±0.5%, ComponentLink1Description=Datasheet, ComponentLink1URL=https://www.seielect.com/catalog/sei-rncf.pdf, ComponentLink2Description="DigiKey Link", ComponentLink2URL=https://www.digikey.com/en/products/detail/stackpole-electronics-inc/RNCF0603DTE3K74/6264039, Composition="Thin Film", Features="Automotive AEC-Q200", Height - Seated (Max)="0.022\" (0.55mm)", id=236, LastUpdated=2023-01-02T20:30:25.090, Lifecycle Status=Active, Minimum Order=1, Number Of Terminations=2, Package / Case="0603 (1608 Metric)", Packaging=TapeAndReel, Part Number=RNCF0603DTE3K74, Part Status=Active, PartId=5365, Price=0.01, Resistance="3.74 kOhms", Series=RNCF, Size / Dimension="0.061\" L x 0.031\" W (1.55mm x 0.80mm)", Supplier 1=DigiKey
S1: "Slide Switch SPDT Surface Mount, Right Angle", Package=None, Check_prices=https://www.snapeda.com/parts/EG1215AA/E-Switch/view-part/?ref=eda, MF=E-Switch, MP=EG1215AA, SnapEDA_Link=https://www.snapeda.com/parts/EG1215AA/E-Switch/view-part/?ref=snap
SW1 SW2: Actuator/Cap Color=Black, Contact Current=50mA, JLCPCB Part Class="Basic Part", LCSC Part Name="4*3*2mm 立贴 轻触开关", Manufacturer=XUNPU(讯普), Operating Force=1.6N, Operating Temperature=-30℃~+80℃, Voltage Rating=12V, Actuator Style="Round Button", Add into BOM=yes, Circuit=SPST, Convert to PCB=yes, Datasheet=https://item.szlcsc.com/datasheet/TS-1088-AR02016/763484.html, Device=TS-1088-AR02016, Length=4mm, Life="100,000 Cycles", Manufacturer Part=TS-1088-AR02016, Mounting Type="Surface Mount,Vertical", Supplier=LCSC, Supplier Footprint=SMD,4x3mm, Supplier Part=C720477, Switch Height=2mm, Symbol=TS-1088-AR02016, Termination Style="SMD(SMT) Tab", Width=3mm, with Bracket="Without Bracket"
U1: "2 A high PSRR ultra low drop linear regulator with reverse current protection", Manufacturer_Name=STMicroelectronics, Copyright="Copyright (C) 2026 Ultra Librarian. All rights reserved.", Manufacturer_Part_Number=LD39200PU33R, RefDes=RefDes, Type=Type
U2: library part LTC4057ES5-4.2TRMPBF, "Linear Li-Ion Battery Charger with Thermal Regulation in ThinSOT", Manufacturer_Name="Analog Devices Inc", Manufacturer_Part_Number=LTC4057ES5-4.2#TRMPBF, Copyright="Copyright (C) 2026 Ultra Librarian. All rights reserved.", RefDes=RefDes, Type=Type
U3: "Mainstream Arm Cortex-M4 MCU 170 MHz with 512 Kbytes of Flash memory, Math Accelerator, High Analog level integration", Manufacturer_Name=STMicroelectronics, Copyright="Copyright (C) 2026 Ultra Librarian. All rights reserved.", Manufacturer_Part_Number=STM32G491CEU6, RefDes=RefDes, Type=Type
U4: "Description", Manufacturer_Name=Murata, Copyright="Copyright (C) 2025 Ultra Librarian. All rights reserved.", Manufacturer_Part_Number=SCL3300-D01-10, RefDes=RefDes, Type=Type
U5: library part VL53L4CXV0DH1, "Time-of-Flight (ToF) sensor with extended range measurement", Manufacturer_Name=STMicroelectronics, Copyright="Copyright (C) 2026 Ultra Librarian. All rights reserved.", Manufacturer_Part_Number=VL53L4CXV0DH/1, RefDes=RefDes, Type=Type
U6: "12-bit, single-channel, ultra-low power DAC in 6-pin SC70 package for battery powered applications", Package="SOT-SC70-6 Texas Instruments", Check_prices=https://www.snapeda.com/parts/DAC7311IDCKR/Texas+Instruments/view-part/?ref=eda, MF="Texas Instruments", MP=DAC7311IDCKR, SnapEDA_Link=https://www.snapeda.com/parts/DAC7311IDCKR/Texas+Instruments/view-part/?ref=snap
Y1: "24 MHz Â±10ppm Crystal 8pF 50 Ohms 4-SMD, No Lead", Package="ECX-1637B2-37B2-4 ECS", Check_prices=https://www.snapeda.com/parts/ECS-240-8-37B-CKY-TR/ECS/view-part/?ref=eda, MF="ECS Inc.", MP=ECS-240-8-37B-CKY-TR, SnapEDA_Link=https://www.snapeda.com/parts/ECS-240-8-37B-CKY-TR/ECS/view-part/?ref=snap

## Free pads (board coordinates)
  round 0.6 hole 3 unplated paste-2539.97: 0(67.5,2.5)
  round 0.6 hole 0.6 unplated paste-2539.97 mask+0: 1(0,26) 2(0,25) 3(0,24) 4(0,23) 5(0,22) 6(0,21) 7(0,20) 8(0,19) 9(0,18) 10(0,17) 11(0,16) 12(0,15) 13(0,14) 14(0,13) 15(0,12) 16(0,11) 17(0,10) 18(0,9)

## Via types
v1: diameter 0.6, hole 0.3, Top Layer to Bottom Layer, tented both sides, 117 vias

## Nets (pads, with @x,y where several pads share a name; then routed paths per layer and width w, separated by ;. In a path a pad name is that pad's centre, name@x,y a point inside that pad or via, vN(x,y) a via of type N, cw(c..) or ccw(c..) an arc to the next point about the centre after c; other vN are vias at no path point)
3V3: C2.2 C3.2 C9.2 C10.2 C11.2 C12.2 C13.2 C14.2 C21.2 C23.2 DP1.1 DS1.1 J3.02 R1.2 R3.2 R11.2 R13.2 R14.2 SW1.1 U1.1 U3.1 U3.20 U3.21 U3.23 U3.35 U3.48 U4.4 U4.9 | length 229.7
  Top Layer w0.2: C9.2 13.16,14.515 13.422,14.777 13.777,14.777 14.861,15.861 15.722,15.861 15.749,15.889 U3.1 ; C12.2 13.9,16.5 14.149,16.749 U3.48 ; U3.20 22.65,20.25 23,19.9 23.475,19.9 23.825,19.55 C10.2 ; U3.21 22.95,20.75 23.2,21 C11.2
  Top Layer w0.3: C13.2 15.575,24.75 15.575,24.2 16.249,23.526 U3.35 ; U3.23 22.451,21.751 22.7,22 22.7,22.9 23.3,23.5 C14.2
  Top Layer w0.5: SW1.1 6.497,4.147 7.8,5.45 11.05,5.45 13.8,8.2 ; C9.2@13.16,14.515 13.16,16.485 C12.2 ; 39.8,8.2 40.2,8.6 44.507,8.6 44.8,8.307 44.8,8 ; 39.8,16.4 39.827,16.4 39.927,16.5 C23.2 ; R13.2@45.9,8 R13.2 44.8,8 ; v1(47,31.2) v1(47,32.1) ; C3.2 v1(48.6,33.5) 48.6,33.473 49,33.073 v1(49,32.1) ; v1(48,32.1) v1(49,32.1) ; U1.1 v1(49.1,30.9) 49.1,31.973 49,32.073 v1(49,32.1) ; R14.2 54.15,7.25 53.7,6.8 45.093,6.8 44.8,7.093 44.8,8
  Top Layer w0.6: v1(23.3,22.6) 23.35,22.55 26.325,22.55 26.775,23 28.4,23 28.5,23
  Top Layer w0.8: v1(27.3,20.3) 29.1,20.3 30.1,21.3 ; 28.4,23 30.1,21.3 ; C21.2 U4.4 ; U4.4@31.231,16.996 33.896,16.996 34.9,18 ; 39.5,17 38.25,17 37.25,18 34.9,18 ; 30.1,21.3 33.3,21.3 34.9,19.7 34.9,18
  Top Layer w1: R3.2 4.193,28.707 v1(4.2,28.7) ; 13.1,8.9 13.114,8.886 ; C9.2@13.114,14.442 13.114,8.886 ; 39.5,17 39.8,16.7 39.8,16.4 39.8,11.8 ; v1(43.5,26.5) R11.2 ; J3.02 43.5,4.5 39.8,8.2 ; v1(48,32.1) v1(47,32.1) v1(46,32.1) 44,32.1 43.4,31.5 43.4,24.1 47.4,20.1 47.4,12.9 46.3,11.8 39.8,11.8 ; 13.114,8.886 13.8,8.2 39.8,8.2 ; 39.8,8.2 39.8,11.8
  Bottom Layer w0.5: v1(4.2,28.7) 6.7,28.7 8,27.4 DP1.1@8,25.12 ; v1(22.7,20.5) 22.727,20.5 22.927,20.3 v1(26.6,20.3) v1(27.3,20.3)
  Bottom Layer w1: DP1.1@8,25.12 10.12,25.12 10.9,25.9 13.7,25.9 ; v1(14.3,24.7) v1(14.3,25.3) 14.3,31.4 16,33.1 21.3,33.1 21.3,30.6 22.3,29.6 41.6,29.6 44.1,32.1 v1(46,32.1) v1(47,32.1) v1(48,32.1) v1(49,32.1)
  other v1: 23.246,20.226 24,22.6
AGND: C24.1 C25.1 C26.1 C27.1 DP2.1 R20.1 U5.2 U5.3 U5.4 U5.6 U5.12 U6.5
  other v1: -8.5,8.8 -8.5,9.5 -8.5,10.3
AVDD: C24.2 C25.2 C26.2 C27.2 DP2.7 LD1.3 U5.1 U5.11 U6.3 | length 28.2
  Top Layer w1: v1(-8.6,13.7) -8.6,16 v1(-7.3,17.3) ; v1@-7.4,17.4 v1@-7.4,19.068 ; v1(-7.4,19.1) -7.4,21.768 -5.65,23.518 -5.65,24.703 -5.165,25.188 ; LD1.3 -5.7,26.325 -5.165,25.79 -5.165,25.188 ; DP2.7@-3.418,25.188 -5.165,25.188
  Bottom Layer w0.5: U5.1 -9.261,12.161 -9.555,12.455 C25.2 C24.2 -7.579,12.521 -7.661,12.439 U5.11 ; C26.2 -8.325,20.53 -8.158,20.697 U6.3
  Bottom Layer w0.6: C26.2 -8.314,19.073 -8.314,17.264 C27.2 -7.347,17.253 v1(-7.3,17.3)
BAT: J2.2 Q1.3 R18.2 U2.3 | length 42.9
  Top Layer w0.8: U2.3 62.45,5.95 64.1,7.6 ; R18.2 63.224,10.8 63.4,10.624 63.4,8.3 64.1,7.6 ; J2.2 67.5,7.9 67.2,7.6 64.1,7.6
  Top Layer w1: Q1.3 58.8,24.6 60.285,23.115 68.7,23.115 69.3,22.514 69.3,11.85 J2.2
BAT_ADC: R18.1 R19.2 U3.18 | length 47.9
  Top Layer w0.3: U3.18 22.624,19.25 22.9,18.974 22.9,18.576 23.076,18.4 25.6,18.4 v1(25.9,18.1) ; v1(48.5,14.6) 52.7,14.6 55.2,12.1 v1(56.1,12.1) ; R19.2 v1(61,9.5) R18.1
  Bottom Layer w0.3: v1(25.9,18.1) 41,18.1 41.8,17.3 41.8,15 43.7,13.1 47,13.1 v1(48.5,14.6) ; v1(56.1,12.1) 58.7,9.5 v1(61,9.5)
CAT_CTRL: DP2.6 U6.1 | length 4.8
  Bottom Layer w0.381: U6.1 -7.003,21.997 -6.42,22.58 DP2.6@-3.35,22.58
GND: C1.1 C2.1 C3.1 C4.1 C5.1 C6.1 C7.1 C8.1 C9.1 C10.1 C11.1 C12.1 C13.1 C14.1 C15.1 C16.1 C17.1 C18.1 C19.1 C20.1 C21.1 C22.1 C23.1 D2.1 D3.1 DP1.7 DS1.2 J1.A1_B12 J1.B1_A12 J1.SH1 J1.SH2 J1.SH3 J1.SH4 J2.1 J3.01 MT1.COM MT1.S1 MT1.S2 R4.1 R5.1 R6.1 R7.1 R8.1 R12.1 R17.1 R19.1 S1.1 SW2.2 U1.3 U1.7 U2.2 U3.49 U4.1 U4.3 U4.11 U4.12 Y1.2 Y1.4 | length 4.6
  Top Layer w0.2: Y1.4 16.975,13.225 17.423,12.777 17.598,12.777 17.752,12.623 17.777,12.623 18.225,12.175 Y1.2
  Top Layer w0.5: C19.1 14.987,13.463 14.987,14.387 v1(15,14.4) ; C11.1 v1(26.1,21) ; C14.1 25.256,23.581 26.081,23.581 v1(26.1,23.6)
  other v1: 3.9,1.5 53.9,4 15,5 65,5 53.8,6 4.2,6.8 17.5,10 27.5,10 32.5,10 37.5,10 42.5,10 18.3,11.2 19.9,11.2 60,11.5 61.6,13.2 41,14.2 25,15 35,15 17.2,17.9 20.2,17.9 32.1,18.7 26.8,19 38.1,19 18.5,19.5 26.1,19.5 32,20 38,20 42.5,20 52.5,20 67.5,20 41,20.6 16.8,21.1 20.1,21.2 61.9,21.2 50,25 55,25 60,25 65,25 56,26.4 51.7,26.5 66.2,26.5 15.4,27.2 45.7,28.2 44.9,29.8 7.5,30 12.5,30 17.5,30 6.7,30.9 6.7,31.9 60,32 56.2,32.1 55.3,33 45.3,33.5 4.4,34
LD: LD1.1 U6.6 | length 8.3
  Bottom Layer w0.381: U6.6 -9.783,27.967 -9.289,28.461 LD1.1
LD_CTRL: DP1.2 U3.12 | length 21.6
  Top Layer w0.3: U3.12 21.251,15.817 21.8,15.267 v1(21.8,14.6)
  Bottom Layer w0.3: DP1.2@8,22.58 12.42,22.58 14,21 14,16.7 16.3,14.4 19.216,14.4 19.616,14.8 20.567,14.8 20.767,14.6 v1(21.8,14.6)
MCU_BOOT: C7.2 R8.2 SW1.2 U3.46 | length 30.5
  Top Layer w0.3: R8.2 1.7,2.266 1.315,2.651 SW1.2 ; C7.2 1.525,6.493 1.525,5.79 1.315,5.58 SW1.2 ; U3.46 10.75,17.75 10.3,17.3 10.3,7.9 8.8,6.4 4.9,6.4 2.647,4.147 SW1.2
MCU_CS: U3.11 U4.5 | length 15
  Top Layer w0.3: U3.11 20.751,14.849 21.1,14.5 21.1,13.5 21.6,13 28.4,13 29.3,13.9 29.3,15.2 30.1,16 U4.5
MCU_INT: DP1.5 U3.39 | length 12.2
  Top Layer w0.3: v1(11.2,20.9) 11.281,20.9 11.632,21.25 U3.39
  Bottom Layer w0.3: DP1.5@8,14.96 9.56,14.96 10.4,15.8 10.4,20.1 v1(11.2,20.9)
MCU_MISO: U3.14 U4.6 | length 11.6
  Top Layer w0.3: U3.14 24.051,17.249 25.9,15.4 v1(26.5,15.4) ; U4.6 v1(31.9,15)
  Bottom Layer w0.3: v1(26.5,15.4) 29,15.4 29.4,15 v1(31.9,15)
MCU_MOSI: U3.15 U4.7 | length 18.2
  Top Layer w0.3: U3.15 24.75,17.75 v1(25.4,17.1) ; v1(35.525,17.125) 36.007,16.643 36.332,16.643 36.741,16.234 36.741,15.959 37.7,15 U4.7
  Bottom Layer w0.3: v1(25.4,17.1) 25.413,17.113 35.512,17.113 v1(35.525,17.125)
MCU_NRST: C6.2 J3.03 R3.1 SW2.1 U3.7 | length 77.7
  Top Layer w0.3: R3.1 2,29.3 1.315,29.985 SW2.1 ; C6.2 2,33.4 1.315,32.715 SW2.1 ; v1(13,24.4) 13,25.3 10.5,27.8 6.8,27.8 3.247,31.353 SW2.1 ; U3.7 18.75,15.331 19,15.081 v1(19,15)
  Bottom Layer w0.3: v1(13,24.4) 13,23.2 14.7,21.5 14.7,16.748 16.003,15.445 18.474,15.445 18.919,15 19.026,15 19.326,15.3 22.1,15.3 22.7,14.7 22.7,7.1 25,4.8 37.7,4.8 38.7,5.8 47.2,5.8 47.7,5.3 47.7,3.1 48.84,1.96 J3.03
MCU_SCK: U3.13 U4.8 | length 17.1
  Top Layer w0.3: U3.13 23.451,16.749 v1(24.1,16.1) ; v1(38.1,16) U4.8
  Bottom Layer w0.3: v1(24.1,16.1) 37.9,16.1 v1@38,16
MCU_SCL: DP1.3 U3.38 | length 7.8
  Top Layer w0.3: DP1.3@8,20.04 9.44,20.04 11.151,21.751 U3.38
MCU_SDA: DP1.4 U3.45 | length 7.4
  Top Layer w0.3: DP1.4@8,17.5 9.5,17.5 10.25,18.25 U3.45
NetC16_2: C16.2 MT1.A R13.1 R15.1 | length 32.2
  Top Layer w0.3: R13.1@47.2,8 47.2,8.017 47.242,8.058 47.242,9.742 MT1.A
  Top Layer w0.5: R15.1 C16.2
  Bottom Layer w0.3: v1(34.85,24.25) 34.85,23.35 35.4,22.8 38.7,22.8 40.3,21.2 48.8,21.2 49.7,20.3 49.7,14 47.5,11.8 MT1.A
NetC17_2: C17.2 MT1.B R14.1 R16.1 | length 34.5
  Top Layer w0.3: 34.825,26.4 34.825,25.675 35.2,25.3 v1(38.7,25.3) ; MT1.B 52.705,9.795 52.705,8.905 52.85,8.76 R14.1
  Top Layer w0.5: R16.1 34.825,26.4 C17.2
  Bottom Layer w0.3: v1(38.7,25.3) 39.3,24.7 39.3,23.3 40.9,21.7 49.1,21.7 50.4,20.4 50.4,13.9 52.5,11.8 MT1.B
NetC18_2: C18.2 U4.2 | length 2
  Top Layer w0.3: C18.2 U4.2
NetC22_2: C22.2 U4.10 | length 2.3
  Top Layer w0.3: U4.10 39.6,18 39.954,18.354 C22.2
NetJ1_A5: J1.A5 R5.2 | length 3.5
  Top Layer w0.3: R5.2 61.6,14.5 61.8,14.7 61.8,15.9 62.15,16.25 J1.A5
NetJ1_B5: J1.B5 R7.2 | length 3
  Top Layer w0.3: R7.2 61.5,20.5 61.8,20.2 61.8,19.5 62.05,19.25 J1.B5
NetMT1_2: MT1.2 R17.2 | length 3.1
  Top Layer w0.3: MT1.2 52.5,26.2 52.729,26.429 R17.2
NetR1_1: R1.1 R4.2 U1.2 | length 3.9
  Top Layer w0.3: R4.2 47.708,28.808 48,29.1 R1.1 48.026,29.95 U1.2
NetR2_1: R2.1 U1.5 | length 16.3
  Top Layer w0.3: U1.5 57.35,29.95 58.1,30.7 58.1,33.1 58.5,33.5 R2.1
NetR2_2: R2.2 S1.2 | length 9.7
  Top Layer w0.3: S1.2 66.25,27.876 66.426,27.7 68.2,27.7 69.1,28.6 69.1,29.9 67.9,31.1 67.9,32.5 67.65,32.75 R2.2
NetR9_1: R9.1 R10.1 | length 3.6
  Top Layer w0.3: R9.1 62.5,2 63,2.5 R10.1
NetR10_2: R10.2 U2.1 | length 2.4
  Top Layer w0.3: U2.1 61.55,4.05 62,4.5 R10.2
NetR12_2: R12.2 U2.5 | length 2.1
  Top Layer w0.3: R12.2 56.2,4.05 U2.5
NetR20_2: R20.2 U6.2 | length 2.8
  Bottom Layer w0.381: U6.2 -5.947,21.347 -5.7,21.1 -5.7,20.581 R20.2
OLED_SCL: DS1.3 U3.31 | length 14.9
  Top Layer w0.3: U3.31 18.25,25.25 21.8,28.8 24.4,28.8 26.3,30.7 DS1.3@26.3,33
OLED_SDA: DS1.4 U3.30 | length 16.5
  Top Layer w0.3: U3.30 18.75,24.85 22.1,28.2 24.9,28.2 27.1,30.4 28.3,30.4 28.9,31 DS1.4@28.9,32.9
OSC_IN: C19.2 U3.5 Y1.1 | length 7.4
  Top Layer w0.3: C19.2 16.9,12.1 Y1.1@17,12.2 ; 16.376,12.1 16.1,12.376 16.1,14.2 16.55,14.65 17.574,14.65 17.75,14.826 U3.5
OSC_OUT: C20.2 U3.6 Y1.3 | length 4.7
  Top Layer w0.3: Y1.3@18.2,13.2 18.275,13.275 19.6,13.275 C20.2 ; Y1.3@18.25,13.25 U3.6
RO_A: R15.2 U3.25 | length 13.9
  Top Layer w0.3: U3.25 21.251,24.596 22.154,25.5 29.5,25.5 30.7,24.3 R15.2
RO_B: R16.2 U3.26 | length 14.4
  Top Layer w0.3: U3.26 20.751,24.885 21.866,26 29.5,26 29.9,26.4 R16.2
RO_SW: C15.2 MT1.1 R11.1 U3.27 | length 38
  Top Layer w0.3: U3.27 20.25,25.15 22.4,27.3 28.6,27.3 29.4,28.1 40.1,28.1 v1(41.5,26.7) ; R11.1 47.515,26.5 ; MT1.1 47.515,24.515 47.515,26.5 ; C15.2 49.38,26.5 47.515,26.5
  Bottom Layer w0.3: v1(41.5,26.7) 43.7,24.5 MT1.1
SWCLK: J3.06 U3.37 | length 55.2
  Top Layer w0.3: v1(14.1,23.5) 14.1,22.8 14.649,22.251 U3.37
  Bottom Layer w0.3: v1(14.1,23.5) 14.1,22.8 15.3,21.6 15.3,17.2 16.5,16 22.2,16 23.4,14.8 23.4,7.5 25.4,5.5 37.4,5.5 38.4,6.5 49.5,6.5 J3.06
SWDIO: J3.04 U3.36 | length 51.4
  Top Layer w0.3: v1(14.9,23.5) 15.433,23.5 15.749,23.183 U3.36 ; v1(43.6,7.2) 44.6,6.2 47.26,6.2 J3.04
  Bottom Layer w0.3: v1(14.9,23.5) 14.9,22.85 15.8,21.95 15.8,17.4 16.7,16.5 22.5,16.5 24,15 24,7.8 25.8,6 37,6 38.2,7.2 v1(43.6,7.2)
SWO: J3.05 U3.41 | length 60.3
  Top Layer w0.3: v1(13,19.2) 13.5,19.2 14.528,20.228 15.025,20.228 U3.41
  Bottom Layer w0.3: v1(13,19.2) 12,18.2 12,6.7 14.4,4.3 38.2,4.3 38.9,5 43.7,5 44.5,4.2 44.5,1.3 45.2,0.6 50.14,0.6 J3.05
TF_XSHUT: DP2.2 U5.5 | length 13.2
  Bottom Layer w0.381: U5.5 -9.261,6.561 -8.8,6.1 -5.8,6.1 -5.1,6.8 -5.1,12.1 -4.78,12.42 DP2.2@-3.35,12.42
TOF_INT: DP2.3 U5.7 | length 10.1
  Bottom Layer w0.381: U5.7 -6.66,7.94 -5.8,8.8 -5.8,13.7 -4.54,14.96 DP2.3@-3.35,14.96
TOF_SCL: DP2.5 U5.10 | length 11.9
  Bottom Layer w0.381: U5.10 -7.06,10.34 -6.5,10.9 -6.5,15.1 -5.5,16.1 -5.5,17.99 -3.45,20.04 DP2.5@-3.35,20.04
TOF_SDA: DP2.4 U5.9 | length 11.7
  Top Layer w0.381: v1(-6.86,9.54) -6.16,9.54 -5.8,9.9 -5.8,16.8 -5.1,17.5 DP2.4@-3.35,17.5
  Bottom Layer w0.381: U5.9 v1(-6.86,9.54)
UART_RX: TP1.1 U3.24 | length 8.6
  Top Layer w0.3: U3.24 21.823,22.251 21.8,22.273 21.8,23.8 22.9,24.9 27.158,24.9 27.758,24.3 TP1.1
UART_TX: TP2.1 U3.22 | length 6
  Top Layer w0.25: U3.22 22.65,21.25 23.346,21.946 26.829,21.946 26.835,21.939 27.361,21.939 TP2.1
USB_D_N: D3.2 J1.A7 J1.B7 U3.33 | length 58.3
  Top Layer w0.35: U3.33 17.25,23.982 17.4,24.132 v1(17.4,24.2) ; D3.2 v1(61.4,16.5) 61.481,16.5 61.731,16.75 ; J1.B7 61.731,16.75 ; J1.A7 61.907,17.75 61.731,17.574 61.731,16.75
  Bottom Layer w0.35: v1(17.4,24.2) 17.352,24.248 17.352,24.494 17.262,24.584 17.262,26.012 18.5,27.25 38.75,27.25 39.75,26.25 43.5,22.5 56.75,22.5 57.25,22 58.25,21 58.25,17.998 59.105,17.143 60.996,17.143 61.352,16.787 61.352,16.548 v1(61.4,16.5)
USB_D_P: D2.2 J1.A6 J1.B6 U3.34 | length 59.9